# Altium PCB Pedal_Filters.PcbDoc (part 4 of 4)
Units mm, origin at the board's own origin, x right, y up, seen from the top; angles counter-clockwise.
Board outline 120.65 x 86.55 mm, 4 copper layers (Top Layer, Layer 1, Layer 2, Bottom Layer); 245 components, 181 nets, 879 pads, 470 vias.
Unrouted connection lines stored in the file: 24.
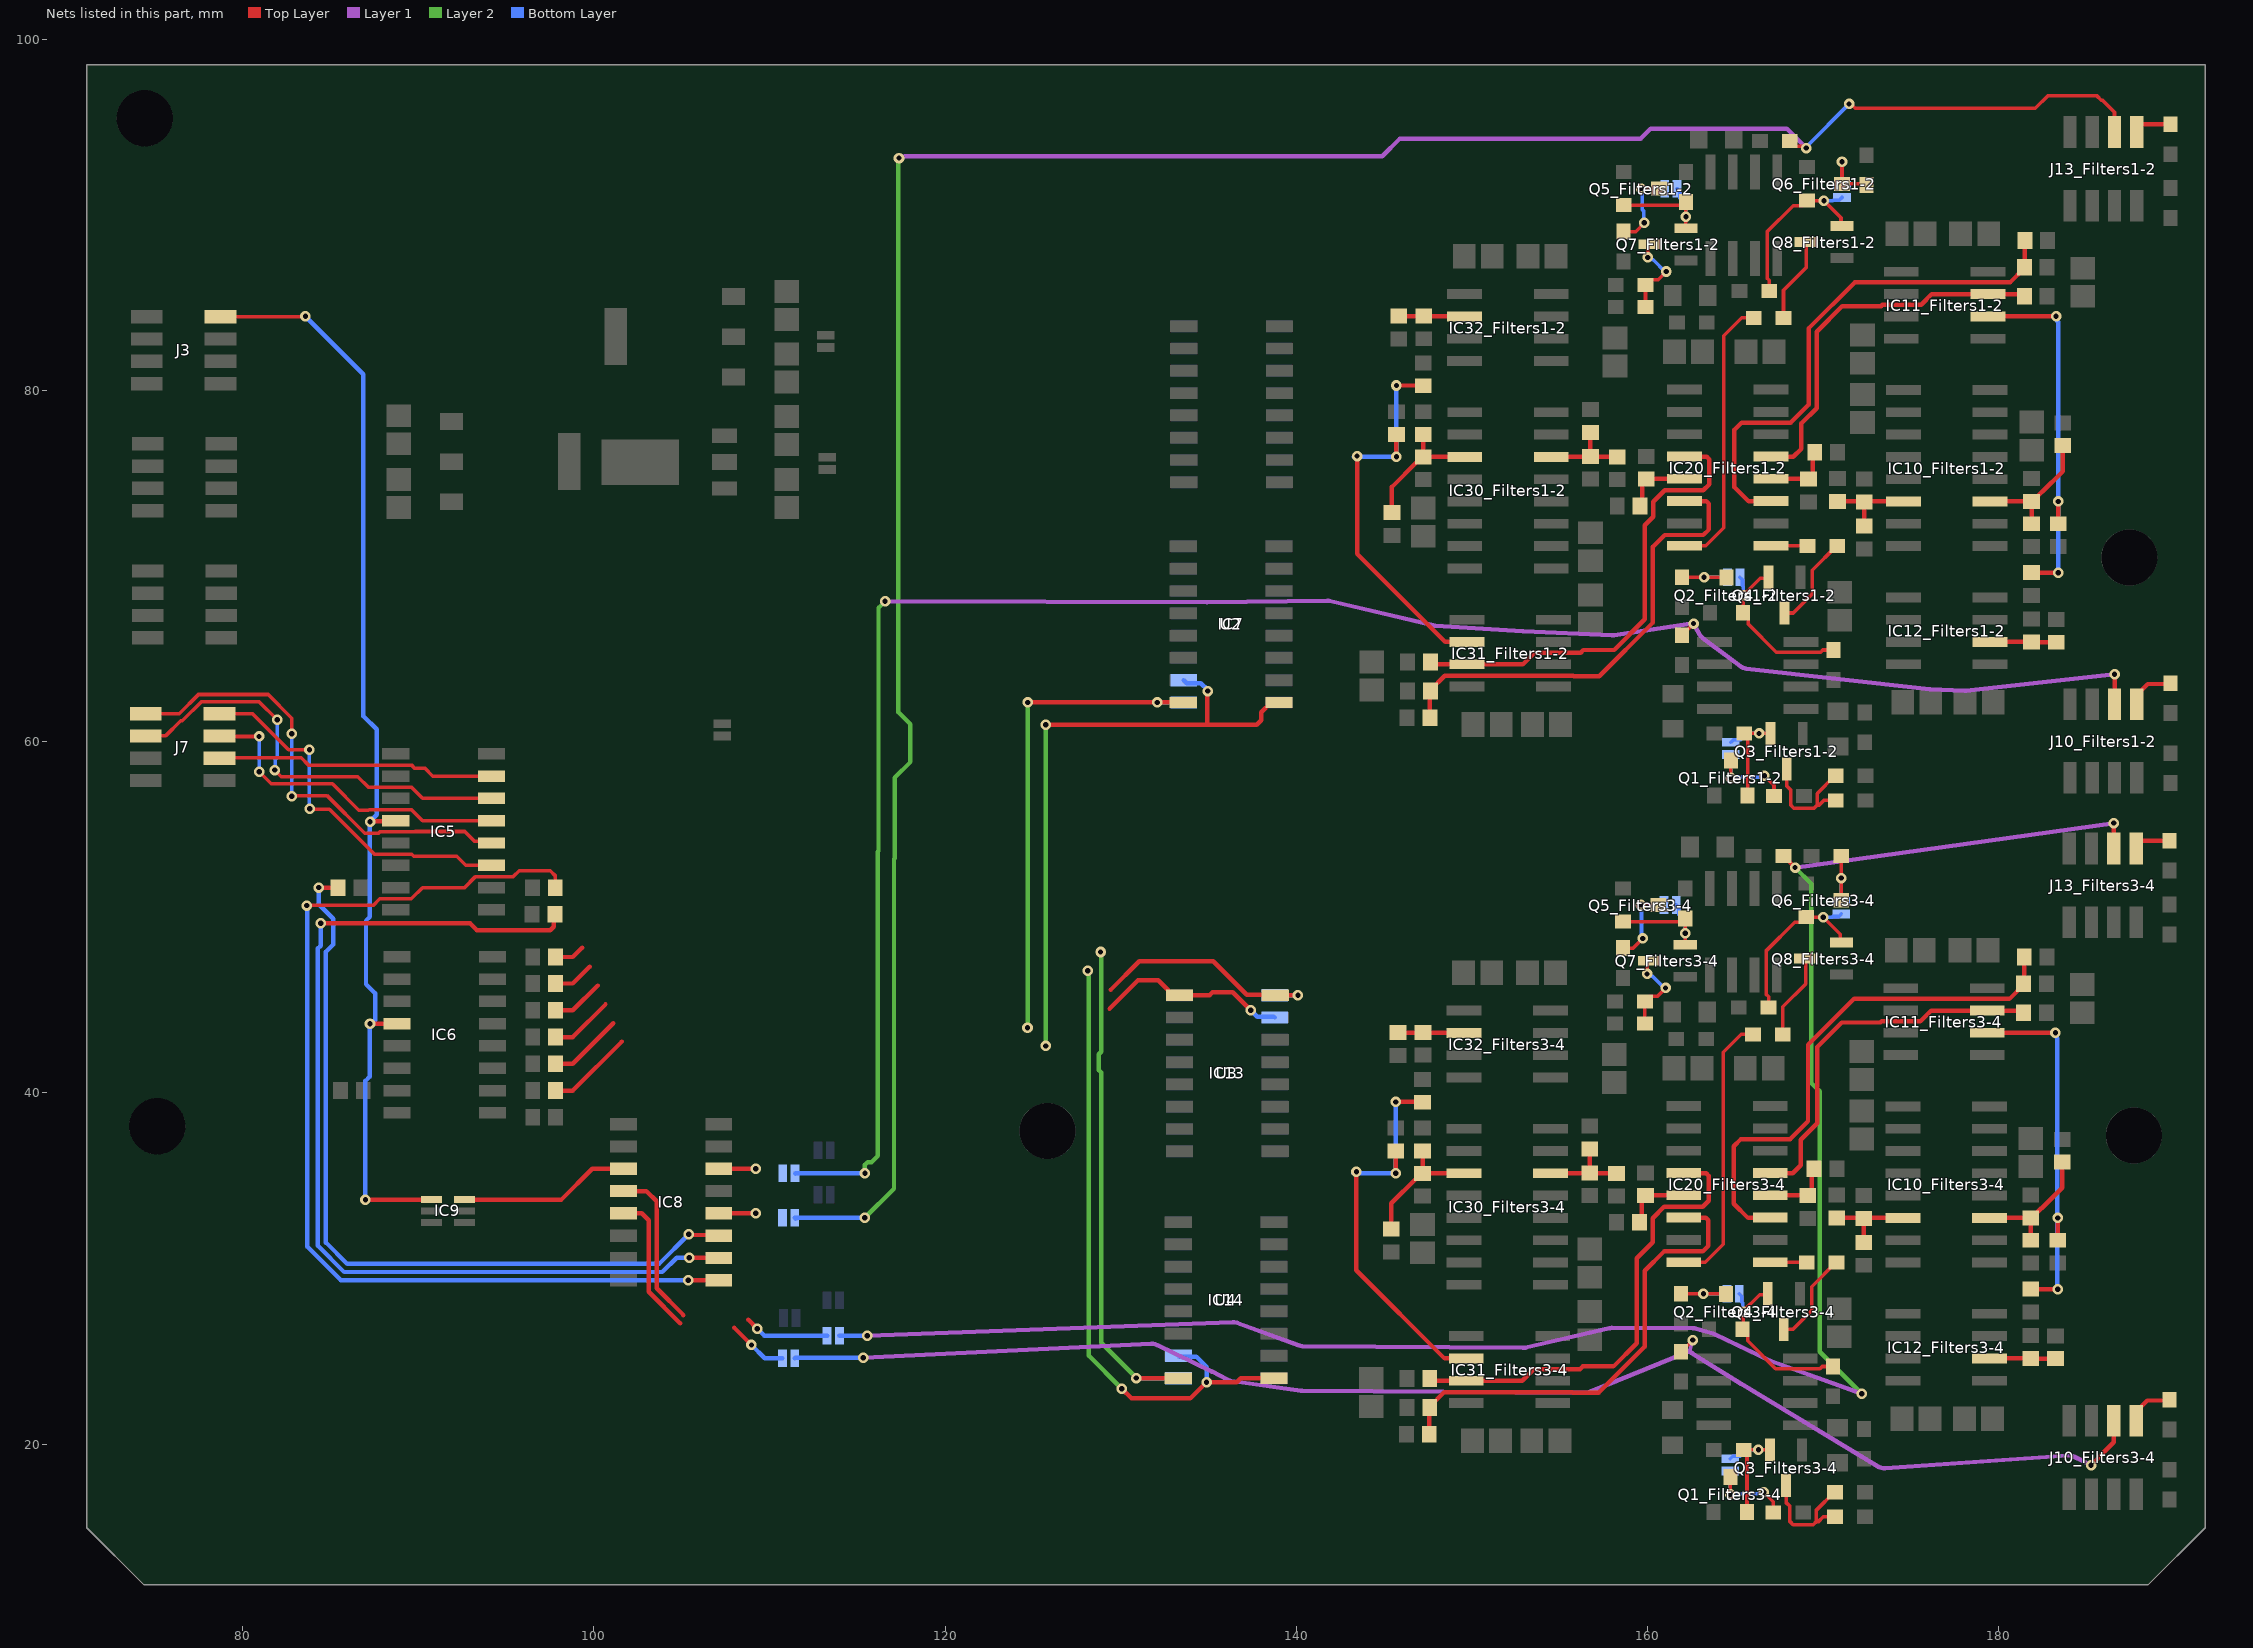
[diagram p6: the nets of this part, all layers, seen from the top]

## Via types
v1: diameter 0.6, hole 0.3, Top Layer to Bottom Layer, tented both sides, 470 vias

## Nets (pads, with @x,y where several pads share a name; then routed paths per layer and width w, separated by ;. In a path a pad name is that pad's centre, name@x,y a point inside that pad or via, vN(x,y) a via of type N, cw(c..) or ccw(c..) an arc to the next point about the centre after c; other vN are vias at no path point) (continued)
NetIC7_1: IC7.1 R36.1 U2.10 | length 40.9
  Top Layer w0.254: R36.1@97.82,40.132 98.806,40.132 101.6,42.926 ; v1(125.73,60.96) 134.943,60.96 ; v1@134.943,62.867 134.943,60.96 ; IC7.1@139.018,62.232 138.568,62.232 138.011,61.675 138.011,61.225 137.746,60.96 134.943,60.96
  Layer 2 w0.254: v1(125.73,42.672) v1(125.73,60.96)
  Bottom Layer w0.254: U2.10@133.594,63.502 133.761,63.335 134.571,63.335 134.957,62.949 v1(134.957,62.88)
NetIC7_16: IC7.16 R37.1 U2.9 | length 33.1
  Top Layer w0.254: R37.1@97.82,41.656 98.806,41.656 101.11,43.96 ; v1(124.716,62.232) IC7.16@133.568,62.232
  Layer 2 w0.254: v1(124.696,43.706) 124.716,43.726 v1(124.716,62.232)
  Bottom Layer w0.254: v1(132.082,62.232) U2.9@133.594,62.232
NetIC8_3: IC8.3 IC9.6 | length 9.8
  Top Layer w0.254: IC9.6@92.644,33.924 98.156,33.924 99.912,35.68 IC8.3@101.691,35.68 IC8.3@101.676,35.695
NetIC8_9: IC8.9 R35.2 | length 59.4
  Top Layer w0.203: v1(83.652,50.668) 83.656,50.673 87.438,50.673 87.814,51.049 89.606,51.049 90.246,51.689 92.634,51.689 93.264,52.319 95.416,52.319 95.75,52.653 97.512,52.653 97.815,52.35 97.815,51.699 R35.2@97.805,51.689
  Top Layer w0.254: v1(105.374,29.33) IC8.9@107.115,29.33
  Bottom Layer w0.254: v1(83.652,50.668) 83.693,50.627 83.693,31.235 85.586,29.342 v1@105.362,29.342
NetIC8_10: IC8.10 R34.2 | length 56.4
  Top Layer w0.254: v1(84.455,49.657) 92.951,49.657 93.344,49.264 97.52,49.264 97.714,49.458 97.714,50.089 R34.2@97.772,50.147 ; v1(105.437,30.615) 107.099,30.615 IC8.10@107.115,30.6
  Bottom Layer w0.254: v1@84.448,49.65 84.448,48.385 84.287,48.223 84.287,31.288 85.775,29.799 103.905,29.799 104.721,30.615 v1(105.437,30.615)
NetIC8_11: IC8.11 R33.2 | length 45.4
  Top Layer w0.254: v1(84.328,51.689) R33.2@85.441,51.689 ; v1(105.402,31.943) 105.439,31.906 107.078,31.906 IC8.11@107.115,31.87
  Bottom Layer w0.254: v1(84.328,51.689) 84.328,50.747 85.159,49.916 85.159,48.449 84.744,48.034 84.744,31.477 85.965,30.256 103.715,30.256 v1(105.402,31.943)
NetIC10_Filters1-2_3: IC10_Filters1-2.3 R3_Filters1-2.2 R7_Filters1-2.2 R9_Filters1-2.1 | length 7.6
  Top Layer w0.254: IC10_Filters1-2.3@179.514,73.679 R3_Filters1-2.2@181.877,73.679 ; R7_Filters1-2.2@181.877,72.409 R3_Filters1-2.2@181.877,73.679 ; R9_Filters1-2.1@183.655,76.854 183.655,75.39 182.488,74.224 182.471,74.224 181.927,73.679 R3_Filters1-2.2@181.877,73.679
NetIC10_Filters1-2_14: IC10_Filters1-2.14 R1_Filters1-2.2 R4_Filters1-2.2 R8_Filters1-2.1 | length 5.2
  Top Layer w0.254: R4_Filters1-2.2@170.828,73.679 172.322,73.679 R1_Filters1-2.2@172.352,73.649 ; R8_Filters1-2.1@172.352,72.282 R1_Filters1-2.2@172.352,73.649 ; IC10_Filters1-2.14@174.587,73.679 172.382,73.679 R1_Filters1-2.2@172.352,73.649
NetIC10_Filters3-4_3: IC10_Filters3-4.3 R3_Filters3-4.2 R7_Filters3-4.2 R9_Filters3-4.1 | length 7.6
  Top Layer w0.254: IC10_Filters3-4.3@179.476,32.878 R3_Filters3-4.2@181.839,32.878 ; R7_Filters3-4.2@181.839,31.608 R3_Filters3-4.2@181.839,32.878 ; R9_Filters3-4.1@183.617,36.053 183.617,34.589 182.45,33.423 182.433,33.423 181.889,32.878 R3_Filters3-4.2@181.839,32.878
NetIC10_Filters3-4_14: IC10_Filters3-4.14 R1_Filters3-4.2 R4_Filters3-4.2 R8_Filters3-4.1 | length 5.2
  Top Layer w0.254: R4_Filters3-4.2@170.79,32.878 172.284,32.878 R1_Filters3-4.2@172.314,32.848 ; R8_Filters3-4.1@172.314,31.481 R1_Filters3-4.2@172.314,32.848 ; IC10_Filters3-4.14@174.549,32.878 172.344,32.878 R1_Filters3-4.2@172.314,32.848
NetIC11_Filters1-2_2: IC11_Filters1-2.2 R10_Filters1-2.1 R11_Filters1-2.1 | length 21.4
  Top Layer w0.254: IC11_Filters1-2.2@179.387,84.22 v1(183.274,84.22) ; R11_Filters1-2.1@181.877,69.63 181.892,69.615 v1(183.401,69.615) ; R10_Filters1-2.1@183.401,72.409 v1(183.401,73.679)
  Bottom Layer w0.254: v1(183.274,84.22) 183.34,84.154 183.34,83.943 183.384,83.898 v1@183.384,69.593
NetIC11_Filters1-2_3: IC11_Filters1-2.3 IC20_Filters1-2.5 R6_Filters1-2.2 | length 21.7
  Top Layer w0.254: IC20_Filters1-2.5@167.018,76.219 168.309,76.219 168.772,76.683 168.772,78.13 169.635,78.993 169.635,83.342 171.102,84.809 173.312,84.809 173.383,84.881 175.587,84.881 176.197,85.49 IC11_Filters1-2.3@179.387,85.49 181.339,85.49 R6_Filters1-2.2@181.466,85.363
NetIC11_Filters3-4_2: IC11_Filters3-4.2 R10_Filters3-4.1 R11_Filters3-4.1 | length 21.4
  Top Layer w0.254: IC11_Filters3-4.2@179.349,43.419 v1(183.236,43.419) ; R11_Filters3-4.1@181.839,28.829 181.854,28.814 v1(183.363,28.814) ; R10_Filters3-4.1@183.363,31.608 v1(183.363,32.878)
  Bottom Layer w0.254: v1(183.236,43.419) 183.302,43.353 183.302,43.142 183.346,43.097 v1@183.346,28.731
NetIC11_Filters3-4_3: IC11_Filters3-4.3 IC20_Filters3-4.5 R6_Filters3-4.2 | length 21.7
  Top Layer w0.254: IC20_Filters3-4.5@166.98,35.418 168.271,35.418 168.734,35.882 168.734,37.329 169.667,38.262 169.667,42.611 171.064,44.008 173.274,44.008 173.345,44.079 175.549,44.079 176.159,44.689 IC11_Filters3-4.3@179.349,44.689 181.301,44.689 R6_Filters3-4.2@181.428,44.562
NetIC12_Filters1-2_6: IC12_Filters1-2.6 R2_Filters1-2.2 R5_Filters1-2.1 | length 3.8
  Top Layer w0.254: IC12_Filters1-2.6@179.518,65.682 179.522,65.678 181.862,65.678 181.877,65.663 R2_Filters1-2.2@183.274,65.663
NetIC12_Filters3-4_6: IC12_Filters3-4.6 R2_Filters3-4.2 R5_Filters3-4.1 | length 3.8
  Top Layer w0.254: IC12_Filters3-4.6@179.48,24.881 179.484,24.877 181.824,24.877 181.839,24.862 R2_Filters3-4.2@183.236,24.862
NetIC13_1: IC13.1 R38.1 U3.10 | length 14.8
  Top Layer w0.254: R38.1@97.82,43.18 98.806,43.18 100.664,45.038 ; 129.366,44.784 130.99,46.408 132.143,46.408 132.704,45.847 132.704,45.759 132.902,45.561 135.066,45.561 135.232,45.727 136.391,45.727 v1(137.414,44.704)
  Bottom Layer w0.254: v1(137.414,44.704) 137.781,44.337 138.73,44.337 U3.10@138.776,44.291
NetIC13_16: IC13.16 R39.1 U3.9 | length 16.4
  Top Layer w0.254: R39.1@97.82,44.704 98.806,44.704 100.217,46.115 ; 129.427,45.861 131.064,47.498 135.267,47.498 137.183,45.581 138.782,45.581 IC13.16@138.802,45.561 v1(140.095,45.561)
  Bottom Layer w0.254: U3.9@138.776,45.561 v1(140.095,45.561)
NetIC14_1: IC14.1 R40.1 U4.10 | length 39
  Top Layer w0.254: R40.1@97.82,46.228 98.806,46.228 99.771,47.193 ; v1@128.115,46.939 v1(128.125,46.949) ; v1(130.07,23.155) 130.619,22.606 133.976,22.606 v1(134.892,23.522) 136.617,23.522 136.846,23.751 IC14.1@138.727,23.751
  Layer 2 w0.254: v1(128.125,46.949) 128.186,46.889 128.186,25.04 v1(130.07,23.155)
  Bottom Layer w0.254: U4.10@133.303,25.021 133.343,24.981 134.298,24.981 134.897,24.383 134.897,23.527 v1(134.892,23.522)
NetIC14_16: IC14.16 R41.1 U4.9 | length 31.8
  Top Layer w0.254: R41.1@97.82,47.737 98.806,47.737 99.329,48.26 ; v1@128.844,48.006 v1(128.86,48.022) ; v1(130.892,23.761) 130.897,23.756 133.272,23.756 IC14.16@133.277,23.751
  Layer 2 w0.254: v1(128.86,48.022) 128.895,47.987 128.895,42.342 128.755,42.201 128.755,41.301 128.895,41.16 128.895,25.775 130.892,23.779 v1(130.892,23.761)
  Bottom Layer w0.254: v1(130.892,23.761) 130.901,23.751 U4.9@133.303,23.751
NetIC20_Filters1-2_3: IC20_Filters1-2.3 R12_Filters1-2.2 R13_Filters1-2.1 | length 30.1
  Top Layer w0.254: IC20_Filters1-2.3@167.018,73.679 165.769,73.679 164.957,74.49 164.957,77.765 165.363,78.171 168.166,78.171 169.178,79.182 169.178,83.531 171.818,86.171 173.312,86.171 173.332,86.151 180.652,86.151 R13_Filters1-2.1@181.456,86.954 ; R13_Filters1-2.1@181.466,87.014 181.496,87.044 R12_Filters1-2.2@181.496,88.538
NetIC20_Filters1-2_4: IC20_Filters1-2.4 R14_Filters1-2.2 R15_Filters1-2.1 | length 3.8
  Top Layer w0.254: IC20_Filters1-2.4@167.018,74.949 IC20_Filters1-2.4@167.039,74.97 169.156,74.97 R14_Filters1-2.2@169.177,74.949 169.406,75.178 169.406,76.351 R15_Filters1-2.1@169.528,76.473
NetIC20_Filters1-2_12: IC20_Filters1-2.12 IC31_Filters1-2.3 R27_Filters1-2.2 | length 26.7
  Top Layer w0.254: R27_Filters1-2.2@147.642,64.535 147.769,64.408 IC31_Filters1-2.3@149.72,64.408 152.911,64.408 153.571,65.069 156.199,65.069 156.352,65.221 158.103,65.221 159.855,66.973 159.855,72.333 160.335,72.813 160.335,73.661 160.984,74.31 163.188,74.31 163.53,74.652 163.53,76.07 163.381,76.219 IC20_Filters1-2.12@162.09,76.219
NetIC20_Filters1-2_13: IC20_Filters1-2.13 R16_Filters1-2.1 R17_Filters1-2.2 | length 3.8
  Top Layer w0.254: R16_Filters1-2.1@159.58,73.425 159.702,73.547 159.702,74.72 159.952,74.97 162.069,74.97 IC20_Filters1-2.13@162.09,74.949
NetIC20_Filters1-2_14: IC20_Filters1-2.14 R18_Filters1-2.1 R19_Filters1-2.2 | length 26.6
  Top Layer w0.254: R19_Filters1-2.2@147.612,61.36 147.612,62.854 R18_Filters1-2.1@147.642,62.884 ; R18_Filters1-2.1@147.652,62.944 148.456,63.748 155.775,63.748 155.796,63.727 157.255,63.727 160.312,66.784 160.312,71.098 160.984,71.77 163.188,71.77 163.503,72.085 163.503,73.551 163.354,73.7 IC20_Filters1-2.14@162.111,73.7
NetIC20_Filters3-4_3: IC20_Filters3-4.3 R12_Filters3-4.2 R13_Filters3-4.1 | length 30.1
  Top Layer w0.254: IC20_Filters3-4.3@166.98,32.878 165.731,32.878 164.919,33.689 164.919,36.964 165.325,37.369 168.128,37.369 169.144,38.386 169.144,42.735 171.78,45.37 173.274,45.37 173.294,45.349 180.614,45.349 R13_Filters3-4.1@181.418,46.153 ; R13_Filters3-4.1@181.428,46.213 181.458,46.243 R12_Filters3-4.2@181.458,47.737
NetIC20_Filters3-4_4: IC20_Filters3-4.4 R14_Filters3-4.2 R15_Filters3-4.1 | length 3.8
  Top Layer w0.254: IC20_Filters3-4.4@166.98,34.148 IC20_Filters3-4.4@167.001,34.169 169.118,34.169 R14_Filters3-4.2@169.139,34.148 169.368,34.377 169.368,35.55 R15_Filters3-4.1@169.49,35.672
NetIC20_Filters3-4_12: IC20_Filters3-4.12 IC31_Filters3-4.3 R27_Filters3-4.2 | length 26.7
  Top Layer w0.254: R27_Filters3-4.2@147.604,23.734 147.731,23.607 IC31_Filters3-4.3@149.682,23.607 152.873,23.607 153.533,24.267 156.161,24.267 156.314,24.42 158.065,24.42 159.385,25.74 159.385,30.585 160.297,31.498 160.297,32.86 160.946,33.509 163.15,33.509 163.492,33.851 163.492,35.269 163.343,35.418 IC20_Filters3-4.12@162.052,35.418
NetIC20_Filters3-4_13: IC20_Filters3-4.13 R16_Filters3-4.1 R17_Filters3-4.2 | length 3.8
  Top Layer w0.254: R16_Filters3-4.1@159.542,32.624 159.664,32.746 159.664,33.919 159.914,34.169 162.031,34.169 IC20_Filters3-4.13@162.052,34.148
NetIC20_Filters3-4_14: IC20_Filters3-4.14 R18_Filters3-4.1 R19_Filters3-4.2 | length 26.6
  Top Layer w0.254: R19_Filters3-4.2@147.574,20.559 147.574,22.053 R18_Filters3-4.1@147.604,22.083 ; R18_Filters3-4.1@147.614,22.143 148.418,22.947 155.737,22.947 155.758,22.926 157.217,22.926 159.842,25.551 159.842,29.865 160.946,30.969 163.15,30.969 163.465,31.284 163.465,32.75 163.316,32.899 IC20_Filters3-4.14@162.073,32.899
NetIC30_Filters1-2_3: IC30_Filters1-2.3 R24_Filters1-2.1 R26_Filters1-2.2 R30_Filters1-2.2 | length 7.6
  Top Layer w0.254: R24_Filters1-2.1@145.453,73.044 145.453,74.508 146.866,75.921 146.933,75.921 R30_Filters1-2.2@147.231,76.219 ; R26_Filters1-2.2@147.231,77.489 R30_Filters1-2.2@147.231,76.219 ; IC30_Filters1-2.3@149.593,76.219 R30_Filters1-2.2@147.231,76.219
NetIC30_Filters1-2_14: IC30_Filters1-2.14 R25_Filters1-2.1 R29_Filters1-2.2 R32_Filters1-2.2 | length 5.2
  Top Layer w0.254: IC30_Filters1-2.14@154.521,76.219 156.726,76.219 R32_Filters1-2.2@156.756,76.249 ; R25_Filters1-2.1@156.756,77.616 R32_Filters1-2.2@156.756,76.249 ; R29_Filters1-2.2@158.28,76.219 156.786,76.219 R32_Filters1-2.2@156.756,76.249
NetIC30_Filters3-4_3: IC30_Filters3-4.3 R24_Filters3-4.1 R26_Filters3-4.2 R30_Filters3-4.2 | length 7.6
  Top Layer w0.254: R24_Filters3-4.1@145.415,32.243 145.415,33.707 146.828,35.12 146.895,35.12 R30_Filters3-4.2@147.193,35.418 ; R26_Filters3-4.2@147.193,36.688 R30_Filters3-4.2@147.193,35.418 ; IC30_Filters3-4.3@149.555,35.418 R30_Filters3-4.2@147.193,35.418
NetIC30_Filters3-4_14: IC30_Filters3-4.14 R25_Filters3-4.1 R29_Filters3-4.2 R32_Filters3-4.2 | length 5.2
  Top Layer w0.254: IC30_Filters3-4.14@154.483,35.418 156.688,35.418 R32_Filters3-4.2@156.718,35.448 ; R25_Filters3-4.1@156.718,36.815 R32_Filters3-4.2@156.718,35.448 ; R29_Filters3-4.2@158.242,35.418 156.748,35.418 R32_Filters3-4.2@156.718,35.448
NetIC31_Filters1-2_2: IC31_Filters1-2.2 R20_Filters1-2.1 R23_Filters1-2.1 | length 23.2
  Top Layer w0.254: v1(143.464,76.264) 143.464,70.701 148.487,65.678 IC31_Filters1-2.2@149.72,65.678 ; v1(145.707,76.219) R23_Filters1-2.1@145.707,77.489 ; v1(145.707,80.283) 147.216,80.283 R20_Filters1-2.1@147.231,80.268
  Bottom Layer w0.254: v1@143.276,76.238 143.438,76.238 v1(143.464,76.264) ; v1@143.513,76.238 143.532,76.219 v1(145.707,76.219) v1@145.707,80.299
NetIC31_Filters3-4_2: IC31_Filters3-4.2 R20_Filters3-4.1 R23_Filters3-4.1 | length 23.2
  Top Layer w0.254: v1(143.426,35.503) 143.426,29.9 148.449,24.877 IC31_Filters3-4.2@149.682,24.877 ; v1(145.669,35.418) R23_Filters3-4.1@145.669,36.688 ; v1(145.669,39.482) 147.178,39.482 R20_Filters3-4.1@147.193,39.467
  Bottom Layer w0.254: v1@143.238,35.437 143.475,35.437 143.494,35.418 145.666,35.418 v1@145.666,39.459
NetIC32_Filters1-2_6: IC32_Filters1-2.6 R28_Filters1-2.1 R31_Filters1-2.2 | length 3.8
  Top Layer w0.254: R31_Filters1-2.2@145.834,84.235 147.257,84.235 147.276,84.217 IC32_Filters1-2.6@149.59,84.217
NetIC32_Filters3-4_6: IC32_Filters3-4.6 R28_Filters3-4.1 R31_Filters3-4.2 | length 3.8
  Top Layer w0.254: R31_Filters3-4.2@145.796,43.434 147.219,43.434 147.238,43.415 IC32_Filters3-4.6@149.552,43.415
NetJ8_Filters1-2_1: J8_Filters1-2.1 Q1_Filters1-2.3 R42_Filters1-2.2 | length 5.7
  Top Layer w0.203: v1(164.757,57.931) Q1_Filters1-2.3@164.757,58.931 ; v1(166.662,58.058) 167.209,57.511 R42_Filters1-2.2@167.209,56.915
  Bottom Layer w0.203: J8_Filters1-2.1@164.757,59.263 164.757,58.007 v1(164.757,57.931) 164.807,57.981 166.478,57.981 166.555,58.058 v1(166.662,58.058)
NetJ8_Filters1-2_2: J8_Filters1-2.2 Q1_Filters1-2.2 Q3_Filters1-2.2 R43_Filters1-2.1 | length 6.9
  Top Layer w0.203: Q1_Filters1-2.2@165.707,56.931 165.707,60.283 R43_Filters1-2.1@165.519,60.471 Q3_Filters1-2.2@167.018,60.471
  Bottom Layer w0.203: J8_Filters1-2.2@164.757,59.963 164.905,60.112 165.312,60.112 165.671,60.471 v1(166.359,60.471)
NetJ8_Filters3-4_1: J8_Filters3-4.1 Q1_Filters3-4.3 R42_Filters3-4.2 | length 5.7
  Top Layer w0.203: v1(164.719,17.13) Q1_Filters3-4.3@164.719,18.13 ; v1(166.624,17.257) 167.171,16.71 R42_Filters3-4.2@167.171,16.114
  Bottom Layer w0.203: J8_Filters3-4.1@164.719,18.462 164.719,17.206 v1(164.719,17.13) 164.769,17.18 166.44,17.18 166.517,17.257 v1(166.624,17.257)
NetJ8_Filters3-4_2: J8_Filters3-4.2 Q1_Filters3-4.2 Q3_Filters3-4.2 R43_Filters3-4.1 | length 6.9
  Top Layer w0.203: Q1_Filters3-4.2@165.669,16.13 165.669,19.482 R43_Filters3-4.1@165.481,19.67 Q3_Filters3-4.2@166.98,19.67
  Bottom Layer w0.203: J8_Filters3-4.2@164.719,19.162 164.867,19.31 165.274,19.31 165.633,19.67 v1(166.321,19.67)
NetJ9_Filters1-2_1: J9_Filters1-2.1 Q2_Filters1-2.3 R44_Filters1-2.2 | length 3.9
  Top Layer w0.203: R44_Filters1-2.2@161.963,69.361 164.487,69.361 Q2_Filters1-2.3@164.503,69.345
  Bottom Layer w0.203: v1(163.225,69.361) J9_Filters1-2.1@164.565,69.361
NetJ9_Filters1-2_2: J9_Filters1-2.2 Q2_Filters1-2.2 Q4_Filters1-2.2 R45_Filters1-2.1 | length 10.3
  Top Layer w0.203: Q4_Filters1-2.2@166.891,69.361 166.832,69.303 166.425,69.303 v1(165.456,68.333) 165.456,67.348 Q2_Filters1-2.2@165.453,67.345 165.751,67.047 165.751,66.678 167.335,65.094 169.862,65.094 169.987,65.219 R45_Filters1-2.1@170.599,65.219
  Bottom Layer w0.203: J9_Filters1-2.2@165.265,69.361 165.413,69.213 165.413,68.886 165.456,68.844 v1(165.456,68.333)
NetJ9_Filters3-4_1: J9_Filters3-4.1 Q2_Filters3-4.3 R44_Filters3-4.2 | length 3.9
  Top Layer w0.203: R44_Filters3-4.2@161.925,28.56 164.449,28.56 Q2_Filters3-4.3@164.465,28.544
  Bottom Layer w0.203: v1(163.187,28.56) J9_Filters3-4.1@164.527,28.56
NetJ9_Filters3-4_2: J9_Filters3-4.2 Q2_Filters3-4.2 Q4_Filters3-4.2 R45_Filters3-4.1 | length 10.3
  Top Layer w0.203: v1@165.418,27.532 166.387,28.501 166.794,28.501 Q4_Filters3-4.2@166.853,28.56 ; v1(165.463,27.532) 165.463,26.592 Q2_Filters3-4.2@165.415,26.544 165.713,26.246 165.713,25.876 167.297,24.293 169.824,24.293 169.949,24.418 R45_Filters3-4.1@170.561,24.418
  Bottom Layer w0.203: J9_Filters3-4.2@165.227,28.56 165.375,28.412 165.375,28.085 165.418,28.043 165.418,27.578 v1(165.463,27.532)
NetJ11_Filters1-2_1: J11_Filters1-2.1 Q5_Filters1-2.3 R52_Filters1-2.2 | length 5.8
  Top Layer w0.203: R52_Filters1-2.2@158.636,89.048 159.326,89.048 v1(159.826,89.547) ; v1(159.652,91.5) Q5_Filters1-2.3@160.652,91.5
  Bottom Layer w0.203: v1(159.826,89.547) 159.779,89.594 159.779,90.224 159.702,90.301 159.702,91.449 v1(159.652,91.5) 159.728,91.5 J11_Filters1-2.1@160.984,91.5
NetJ11_Filters1-2_2: J11_Filters1-2.2 Q5_Filters1-2.2 Q7_Filters1-2.2 R53_Filters1-2.1 | length 6.9
  Top Layer w0.203: Q5_Filters1-2.2@158.652,90.55 162.004,90.55 R53_Filters1-2.1@162.192,90.738 Q7_Filters1-2.2@162.192,89.239
  Bottom Layer w0.203: J11_Filters1-2.2@161.684,91.5 161.832,91.351 161.832,90.945 162.192,90.585 v1(162.192,89.898)
NetJ11_Filters3-4_1: J11_Filters3-4.1 Q5_Filters3-4.3 R52_Filters3-4.2 | length 5.7
  Top Layer w0.203: R52_Filters3-4.2@158.598,48.246 159.194,48.246 v1(159.741,48.793) ; v1(159.614,50.698) Q5_Filters3-4.3@160.614,50.698
  Bottom Layer w0.203: v1(159.741,48.793) 159.741,48.901 159.664,48.978 159.664,50.648 v1(159.614,50.698) 159.69,50.698 J11_Filters3-4.1@160.946,50.698
NetJ11_Filters3-4_2: J11_Filters3-4.2 Q5_Filters3-4.2 Q7_Filters3-4.2 R53_Filters3-4.1 | length 6.9
  Top Layer w0.203: Q5_Filters3-4.2@158.614,49.748 161.966,49.748 R53_Filters3-4.1@162.154,49.936 Q7_Filters3-4.2@162.154,48.438
  Bottom Layer w0.203: J11_Filters3-4.2@161.646,50.698 161.794,50.55 161.794,50.144 162.154,49.784 v1(162.154,49.097)
NetJ12_Filters1-2_1: J12_Filters1-2.1 Q6_Filters1-2.3 R54_Filters1-2.2 | length 4
  Top Layer w0.203: v1(171.082,93.032) Q6_Filters1-2.3@171.082,91.77 172.39,91.77 R54_Filters1-2.2@172.466,91.694
  Bottom Layer w0.203: J12_Filters1-2.1@171.082,91.692 v1(171.082,93.032)
NetJ12_Filters1-2_2: J12_Filters1-2.2 Q6_Filters1-2.2 Q8_Filters1-2.2 R55_Filters1-2.1 | length 10.4
  Top Layer w0.203: R55_Filters1-2.1@166.94,85.658 166.94,86.27 166.814,86.395 166.814,89.04 168.296,90.521 168.783,90.521 169.066,90.804 169.068,90.801 v1(170.053,90.801) 171.023,89.831 171.023,89.425 Q8_Filters1-2.2@171.082,89.366
  Bottom Layer w0.203: v1(170.053,90.801) 170.564,90.801 170.606,90.843 170.933,90.843 J12_Filters1-2.2@171.082,90.992
NetJ12_Filters3-4_1: J12_Filters3-4.1 Q6_Filters3-4.3 R54_Filters3-4.2 | length 3.9
  Top Layer w0.203: Q6_Filters3-4.3@171.044,50.968 R54_Filters3-4.2@171.044,53.492
  Bottom Layer w0.203: J12_Filters3-4.1@171.044,50.89 v1(171.044,52.23)
NetJ12_Filters3-4_2: J12_Filters3-4.2 Q6_Filters3-4.2 Q8_Filters3-4.2 R55_Filters3-4.1 | length 10.3
  Top Layer w0.203: R55_Filters3-4.1@166.902,44.856 166.902,45.469 166.776,45.594 166.776,48.112 168.384,49.72 168.745,49.72 169.028,50.002 169.03,50 v1(170.015,50) 170.985,49.03 170.985,48.623 Q8_Filters3-4.2@171.044,48.565
  Bottom Layer w0.203: v1(170.015,50) 170.526,50 170.568,50.042 170.895,50.042 J12_Filters3-4.2@171.044,50.19
NetQ3_Filters1-2_3: Q3_Filters1-2.3 R49_Filters1-2.2 R50_Filters1-2.2 | length 7.1
  Top Layer w0.203: Q3_Filters1-2.3@167.932,58.439 167.932,57.473 168.154,57.251 168.154,56.389 168.333,56.21 169.485,56.21 169.664,56.389 ; R50_Filters1-2.2@170.726,56.661 170.052,56.661 169.78,56.389 169.664,56.389 ; R49_Filters1-2.2@170.726,58.058 170.676,58.058 169.664,57.046 169.664,56.588 169.664,56.389
NetQ3_Filters3-4_3: Q3_Filters3-4.3 R49_Filters3-4.2 R50_Filters3-4.2 | length 7.1
  Top Layer w0.203: Q3_Filters3-4.3@167.894,17.638 167.894,16.672 168.116,16.45 168.116,15.588 168.295,15.409 169.447,15.409 169.626,15.588 ; R50_Filters3-4.2@170.688,15.86 170.014,15.86 169.742,15.588 169.626,15.588 ; R49_Filters3-4.2@170.688,17.257 170.638,17.257 169.626,16.245 169.626,15.588
NetQ4_Filters1-2_3: Q4_Filters1-2.3 R51_Filters1-2.2 | length 5.4
  Top Layer w0.203: Q4_Filters1-2.3@167.805,67.329 168.308,67.329 169.387,68.408 169.387,69.762 170.764,71.139 R51_Filters1-2.2@170.814,71.139
NetQ4_Filters3-4_3: Q4_Filters3-4.3 R51_Filters3-4.2 | length 5.4
  Top Layer w0.203: Q4_Filters3-4.3@167.767,26.528 168.27,26.528 169.349,27.607 169.349,28.961 170.726,30.338 R51_Filters3-4.2@170.776,30.338
NetQ7_Filters1-2_3: Q7_Filters1-2.3 R60_Filters1-2.2 R61_Filters1-2.2 | length 5
  Top Layer w0.203: R61_Filters1-2.2@159.892,84.743 R60_Filters1-2.2@159.892,86.013 160.19,86.312 160.61,86.312 v1(161.074,86.775) ; v1(160.02,87.575) 160.02,88.185 Q7_Filters1-2.3@160.16,88.325
  Bottom Layer w0.203: v1(160.02,87.575) 160.127,87.575 160.265,87.437 160.331,87.437 160.993,86.775 v1(161.074,86.775)
NetQ7_Filters3-4_3: Q7_Filters3-4.3 R60_Filters3-4.2 R61_Filters3-4.2 | length 5
  Top Layer w0.203: R61_Filters3-4.2@159.854,43.942 R60_Filters3-4.2@159.854,45.212 160.152,45.51 160.572,45.51 v1(161.036,45.974) ; v1(159.982,46.774) 159.982,47.384 Q7_Filters3-4.3@160.122,47.523
  Bottom Layer w0.203: v1(159.982,46.774) 160.089,46.774 160.227,46.636 160.293,46.636 160.955,45.974 v1(161.036,45.974)
NetQ8_Filters1-2_3: Q8_Filters1-2.3 R62_Filters1-2.2 | length 4.9
  Top Layer w0.203: R62_Filters1-2.2@167.75,84.135 167.75,85.704 169.05,87.003 Q8_Filters1-2.3@169.05,88.452
NetQ8_Filters3-4_3: Q8_Filters3-4.3 R62_Filters3-4.2 | length 4.9
  Top Layer w0.203: R62_Filters3-4.2@167.712,43.334 167.712,44.902 169.012,46.202 Q8_Filters3-4.3@169.012,47.65
NSS: IC5.12 IC6.12 IC9.1 J3.1 | length 64.3
  Top Layer w0.203: J3.1@78.74,84.201 83.547,84.201 v1(83.574,84.228)
  Top Layer w0.254: v1(86.995,33.909) 87.01,33.924 IC9.1@90.744,33.924 ; v1(87.254,43.942) IC6.12@88.784,43.942 ; v1(87.258,55.442) 87.287,55.47 88.686,55.47 IC5.12@88.715,55.499
  Bottom Layer w0.254: v1(83.574,84.228) 86.876,80.926 86.876,61.46 87.63,60.706 87.63,55.843 87.255,55.468 v1@87.249,55.462 ; v1(86.995,33.909) 86.995,40.681 87.244,40.931 87.244,43.932 v1(87.254,43.942) ; v1@87.254,43.992 87.397,43.992 87.546,44.141 87.549,44.141 87.549,45.662 87.025,46.186 87.025,49.814 87.249,50.038 87.249,55.432 v1(87.258,55.442)
Q1: IC8.14 J15.1 | length 2.1
  Top Layer w0.254: IC8.14@107.115,35.68 107.119,35.684 v1(109.22,35.684)
Q2: IC8.12 J17.1 | length 2.1
  Top Layer w0.254: IC8.12@107.115,33.14 v1(109.22,33.14)
Q3: IC8.5 J19.1 | length 11.7
  Top Layer w0.254: IC8.5@101.691,33.14 102.733,33.14 103.124,32.749 103.124,28.677 104.912,26.888 ; 107.986,26.634 v1(108.977,25.643)
  Bottom Layer w0.254: v1(108.977,25.643) 109.728,24.892 J19.1@110.744,24.892
Q4: IC8.4 J21.1 | length 14.1
  Top Layer w0.254: IC8.4@101.691,34.41 102.993,34.41 103.581,33.822 103.581,28.866 105.102,27.346 ; 108.787,27.092 v1(109.308,26.57)
  Bottom Layer w0.254: v1(109.308,26.57) 109.716,26.162 J21.1@113.284,26.162
Q_1_Filters1-2: IC20_Filters1-2.1 R51_Filters1-2.1 | length 2.1
  Top Layer w0.203: IC20_Filters1-2.1@167.039,71.16 169.093,71.16 R51_Filters1-2.1@169.114,71.139
Q_1_Filters3-4: IC20_Filters3-4.1 R51_Filters3-4.1 | length 2.1
  Top Layer w0.203: IC20_Filters3-4.1@167.001,30.359 169.055,30.359 R51_Filters3-4.1@169.076,30.338
Q_2_Filters1-2: IC20_Filters1-2.16 R62_Filters1-2.1 | length 15.7
  Top Layer w0.203: IC20_Filters1-2.16@162.111,71.16 163.325,71.16 164.351,72.186 164.351,83.109 165.376,84.135 R62_Filters1-2.1@166.05,84.135
Q_2_Filters3-4: IC20_Filters3-4.16 R62_Filters3-4.1 | length 15.7
  Top Layer w0.203: IC20_Filters3-4.16@162.073,30.359 163.287,30.359 164.313,31.384 164.313,42.308 165.338,43.334 R62_Filters3-4.1@166.012,43.334
Q_POT_T1_Filters1-2: J10_Filters1-2.2 R63_Filters1-2.2 | length 2.5
  Top Layer w0.254: J10_Filters1-2.2@187.871,62.369 187.871,62.657 188.497,63.283 189.73,63.283 R63_Filters1-2.2@189.776,63.329
Q_POT_T1_Filters3-4: J10_Filters3-4.2 R63_Filters3-4.2 | length 2.7
  Top Layer w0.254: J10_Filters3-4.2@187.833,21.336 187.833,21.856 188.459,22.482 189.692,22.482 R63_Filters3-4.2@189.738,22.528
Q_POT_T2_Filters1-2: J13_Filters1-2.2 R57_Filters1-2.2 | length 2
  Top Layer w0.254: J13_Filters1-2.2@187.871,94.904 188.124,95.157 R57_Filters1-2.2@189.776,95.157
Q_POT_T2_Filters3-4: J13_Filters3-4.2 R57_Filters3-4.2 | length 2.2
  Top Layer w0.254: J13_Filters3-4.2@187.833,53.916 187.833,54.103 188.086,54.356 R57_Filters3-4.2@189.738,54.356
Q_POT_W1_Filters1-2: J10_Filters1-2.4 J15.2 R48_Filters1-2.1 | length 111.2
  Top Layer w0.203: R48_Filters1-2.1@161.963,66.109 162.261,66.408 162.309,66.408 v1(162.626,66.724) v1(162.626,66.724)
  Top Layer w0.254: J10_Filters1-2.4@186.601,62.137 v1(186.601,63.838)
  Layer 1 w0.254: v1(116.586,67.991) 134.908,67.927 ccw(c134.91,68.608) 134.92,67.927 141.759,68.029 cw(c141.769,67.348) 141.926,68.01 147.805,66.622 ccw(c147.961,67.285) 147.917,66.606 152.913,66.283 ccw(c152.958,66.962) 152.927,66.282 157.974,66.053 ccw(c158.005,66.733) 158.108,66.06 162.437,66.721 cw(c162.475,66.47) 162.475,66.724 v1(162.626,66.724) 162.955,66.12 ccw(c163.553,66.445) 163.146,65.899 165.296,64.294 ccw(c165.703,64.839) 165.628,64.162 176.079,62.996 ccw(c176.154,63.673) 176.119,62.993 178.032,62.894 ccw(c178.067,63.574) 178.143,62.898 v1(186.601,63.838)
  Layer 2 w0.254: v1(115.44,35.43) 115.44,35.901 115.589,36.049 115.814,36.049 116.18,36.415 116.18,53.719 116.212,53.751 116.212,67.617 v1(116.586,67.991)
  Bottom Layer w0.254: J15.2@111.511,35.379 J15.2@111.46,35.43 v1(115.44,35.43)
Q_POT_W1_Filters3-4: J10_Filters3-4.4 J19.2 R48_Filters3-4.1 | length 81.6
  Top Layer w0.203: R48_Filters3-4.1@161.925,25.258 161.925,25.308 162.223,25.606 162.271,25.606 v1(162.588,25.923) v1(162.588,25.923)
  Top Layer w0.254: v1(185.262,18.796) 186.563,20.097 J10_Filters3-4.4@186.563,21.336
  Layer 1 w0.203: 162.425,25.251 162.425,25.36 cw(c162.629,25.36) 162.434,25.419 v1(162.588,25.923)
  Layer 1 w0.254: v1(115.342,24.918) 131.756,25.704 cw(c131.788,25.024) 132.085,25.637 135.188,24.135 cw(c134.892,23.522) 135.21,24.124 136.08,23.664 ccw(c136.398,24.266) 136.305,23.591 140.267,23.047 ccw(c140.36,23.722) 140.355,23.041 156.459,22.926 ccw(c156.464,23.607) 156.721,22.976 162.254,25.232 cw(c162.35,24.997) 162.35,25.251 162.425,25.251 162.489,25.21 cw(c162.35,24.997) 162.498,25.203 162.532,25.179 ccw(c162.678,25.387) 162.541,25.173 162.548,25.168 ccw(c162.686,25.382) 162.552,25.166 165.3,23.445 ccw(c165.662,24.022) 165.31,23.439 173.13,18.721 ccw(c173.482,19.304) 173.529,18.625 183.951,19.348 cw(c183.999,18.669) 184.305,19.277 v1(185.262,18.796)
  Bottom Layer w0.254: J19.2@111.444,24.892 111.47,24.918 v1(115.342,24.918)
Q_POT_W2_Filters1-2: J13_Filters1-2.4 J17.2 R59_Filters1-2.1 | length 140.2
  Top Layer w0.203: R59_Filters1-2.1@168.104,94.207 168.402,93.908 168.829,93.908 168.932,93.805 v1(169.039,93.805) ; v1(171.483,96.319) 171.59,96.319 171.837,96.072 182.09,96.072 182.791,96.774 185.603,96.774 185.852,96.525 185.917,96.525 186.601,95.841 J13_Filters1-2.4@186.601,94.717
  Layer 1 w0.254: v1(117.378,93.238) 117.444,93.304 117.66,93.304 117.7,93.344 144.903,93.344 145.905,94.345 159.623,94.345 160.196,94.918 167.927,94.918 v1(169.039,93.805)
  Layer 2 w0.254: v1(115.436,32.886) 117.094,34.544 117.094,53.34 117.127,53.373 117.127,57.945 118.029,58.847 118.029,60.988 117.348,61.669 117.348,93.208 v1(117.378,93.238)
  Bottom Layer w0.203: v1(169.039,93.805) 169.039,93.867 v1@171.483,96.31
  Bottom Layer w0.254: J17.2@111.499,32.831 J17.2@111.444,32.886 v1(115.436,32.886)
Q_POT_W2_Filters3-4: J13_Filters3-4.4 J21.2 R59_Filters3-4.1 | length 111.6
  Top Layer w0.203: R59_Filters3-4.1@167.742,53.492 167.792,53.492 168.09,53.194 168.09,53.147 v1(168.406,52.829) v1(168.406,52.829)
  Top Layer w0.254: J13_Filters3-4.4@186.563,53.916 v1(186.563,55.366)
  Layer 1 w0.254: v1(115.57,26.162) 136.381,26.939 cw(c136.407,26.259) 136.641,26.898 140.126,25.622 ccw(c140.36,26.262) 140.355,25.581 152.914,25.48 ccw(c152.92,26.161) 153.073,25.498 157.813,26.595 cw(c157.967,25.932) 157.968,26.613 162.59,26.604 cw(c162.588,25.923) 162.784,26.575 163.711,26.296 cw(c163.515,25.644) 163.809,26.258 166.957,24.753 ccw(c167.25,25.367) 167.02,24.726 v1(172.212,22.86) ; v1(168.406,52.829) v1(186.563,55.366)
  Layer 2 w0.254: v1(168.406,52.829) 169.334,51.901 169.334,40.564 169.813,40.086 169.813,25.259 v1(172.212,22.86)
  Bottom Layer w0.254: J21.2@113.984,26.162 v1(115.57,26.162)
Reg_Pin1: IC5.3 J7.1 | length 21
  Top Layer w0.203: J7.1@78.681,61.595 80.565,61.595 82.614,59.545 v1(83.803,59.545) ; v1(83.815,56.173) 83.836,56.152 84.945,56.152 87.508,53.589 89.616,53.589 89.738,53.467 92.202,53.467 92.71,52.959 IC5.3@94.165,52.959
  Bottom Layer w0.203: v1(83.803,59.545) 83.803,56.185 v1(83.815,56.173)
Reg_Pin2: IC5.4 J7.2 | length 26.4
  Top Layer w0.203: J7.2@74.481,61.595 76.395,61.595 77.486,62.686 81.457,62.686 82.804,61.339 v1(82.804,60.452) ; v1(82.804,56.896) 82.839,56.931 84.801,56.931 86.946,54.786 87.741,54.786 87.824,54.869 89.83,54.869 89.845,54.885 92.646,54.885 93.204,54.326 94.068,54.326 IC5.4@94.165,54.229
  Bottom Layer w0.203: v1(82.804,56.896) v1(82.804,60.452)
Reg_Pin3: IC5.5 J7.3 | length 18.7
  Top Layer w0.203: J7.3@78.681,60.325 78.711,60.295 v1(80.937,60.295) ; v1(80.941,58.28) 81.626,57.595 85.114,57.595 86.62,56.09 87.163,56.09 87.201,56.129 89.616,56.129 90.246,55.499 IC5.5@94.165,55.499
  Bottom Layer w0.203: v1(80.937,60.295) 80.939,60.293 80.939,58.282 v1(80.941,58.28)
Reg_Pin4: IC5.6 J7.4 | length 24.7
  Top Layer w0.203: J7.4@74.481,60.325 75.605,60.325 76.468,61.189 76.564,61.189 77.655,62.28 80.936,62.28 v1(81.965,61.251) ; v1(81.824,58.381) 82.203,58.002 86.562,58.002 87.165,57.399 89.616,57.399 90.246,56.769 IC5.6@94.165,56.769
  Bottom Layer w0.203: v1(81.824,58.381) 81.864,58.421 81.864,58.986 81.965,59.087 v1(81.965,61.251)
Reg_Pin5: IC5.7 J7.5 | length 15.9
  Top Layer w0.203: J7.5@78.681,59.055 78.706,59.08 83.341,59.08 83.753,58.669 89.616,58.669 89.811,58.474 90.395,58.474 90.83,58.039 IC5.7@94.165,58.039
pads on no net: IC4.9 IC4.10 IC4.11 IC4.12 IC4.13 IC7.9 IC7.10 IC7.11 IC7.12 IC7.13 IC10_Filters1-2.2 IC10_Filters1-2.7 IC10_Filters1-2.8 IC10_Filters1-2.9 IC10_Filters1-2.10 IC10_Filters1-2.15 IC10_Filters3-4.2 IC10_Filters3-4.7 IC10_Filters3-4.8 IC10_Filters3-4.9 IC10_Filters3-4.10 IC10_Filters3-4.15 IC13.9 IC13.10 IC13.11 IC13.12 IC13.13 IC14.9 IC14.10 IC14.11 IC14.12 IC14.13 IC20_Filters1-2.2 IC20_Filters1-2.7 IC20_Filters1-2.8 IC20_Filters1-2.9 IC20_Filters1-2.10 IC20_Filters1-2.15 IC20_Filters3-4.2 IC20_Filters3-4.7 IC20_Filters3-4.8 IC20_Filters3-4.9 IC20_Filters3-4.10 IC20_Filters3-4.15 IC30_Filters1-2.2 IC30_Filters1-2.7 IC30_Filters1-2.8 IC30_Filters1-2.9 IC30_Filters1-2.10 IC30_Filters1-2.15 IC30_Filters3-4.2 IC30_Filters3-4.7 IC30_Filters3-4.8 IC30_Filters3-4.9 IC30_Filters3-4.10 IC30_Filters3-4.15 U1.1 U1.2 U1.3 U1.4 U1.5 U2.1 U2.2 U2.3 U2.4 U2.5 U3.1 U3.2 U3.3 U3.4 U3.5 U4.1 U4.2 U4.3 U4.4 U4.5

## Polygon pours and split planes (outlines as drawn)
GND on Bottom Layer "NONET_L02_P-001" (solid, remove dead copper, pour order 4): 67.31,98.552 67.31,12 129.794,12 129.794,98.552 123.19,98.552
GND on Bottom Layer "NONET_L02_P-001" (solid, remove dead copper, pour order 8): 129.794,98.552 129.794,12 191.008,12 191.008,98.552
GND on Layer 2 "NONET_L02_P-001" (solid, remove dead copper, pour order 3): 129.672,98.552 191.008,98.552 191.008,12.192 190.754,11.938 129.672,11.938
GND on Layer 2 "NONET_L02_P-001" (solid, remove dead copper, pour order 0): 129.794,98.552 129.794,12 191.008,12 191.008,98.552
+5 on Layer 2 "NONET_L02_P-001" (solid, remove dead copper, pour order 5): 68.834,82.296 69.85,81.28 69.85,60.706 69.85,57.912 82.042,57.912 86.36,57.912 86.868,57.404 86.868,38.1 86.36,37.592 85.09,37.592 84.074,38.608 84.074,52.07 83.058,53.086 80.772,53.086 80.01,52.324 68.072,52.324 67.056,53.34 67.056,82.296
GND on Layer 2 "NONET_L02_P-001" (solid, remove dead copper, pour order 10): 75.438,77.47 75.438,65.024 78.74,61.722 84.074,61.722 84.836,62.484 84.836,75.946 83.312,77.47
+12 on Layer 1 "NONET_L02_P-001" (solid, remove dead copper, pour order 6): 67.056,73.406 88.138,73.406 88.9,74.168 89.154,73.914 93.726,73.914 104.902,85.09 108.966,85.09 108.966,85.344 113.792,90.17 158.75,90.17 159.766,91.186 176.022,91.186 177.292,89.916 177.292,88.646 176.784,88.138 171.196,88.138 163.322,88.138 162.052,86.868 154.94,86.868 154.174,86.102 118.182,86.102 101.93,69.85 67.564,69.85 67.056,70.358
-12 on Layer 1 "NONET_L02_P-001" (solid, remove dead copper, pour order 7): 67.056,73.406 88.138,73.406 88.646,73.914 93.726,73.914 104.902,85.09 108.966,85.09 108.966,85.344 113.792,90.17 158.75,90.17 159.766,91.186 176.022,91.186 177.292,89.916 177.292,88.646 176.784,88.138 171.196,88.138 163.322,88.138 162.052,86.868 162.035,86.885 155.431,86.885 155.194,87.122 154.174,86.102 149.356,86.102 151.882,83.576 154.695,83.576 155.976,82.295 156.52,82.295 157.537,83.312 180.086,83.312 183.134,86.36 183.134,89.154 177.8,94.488 146.048,94.488 144.778,93.218 100.33,93.218 86.614,79.502 67.056,79.502
DGND on Top Layer "NONET_L02_P-001" (solid, remove dead copper, pour order 1): 67.31,98.552 67.31,12 129.032,12 129.032,98.552 123.19,98.552

## Silkscreen, mask and mechanical layers (free items; w line width, h text height)
Top Overlay:
  lines w0.2: 72.834,92.754 72.409,93.491 71.246,95.504 72.834,98.254 ; 72.834,92.754 76.009,92.754 ; 72.834,92.754 76.009,98.254 ; 72.834,98.254 76.009,92.754 ; 72.834,98.254 76.009,98.254 ; 73.551,35.35 76.726,40.85 ; 73.551,35.35 76.726,35.35 ; 73.551,35.35 73.125,36.087 71.963,38.1 73.551,40.85 ; 73.551,40.85 76.726,40.85 ; 73.551,40.85 76.726,35.35 ; 76.009,92.754 77.597,95.504 76.009,98.254 ; 76.726,35.35 78.314,38.1 76.726,40.85 ; 124.252,35.084 123.827,35.821 122.665,37.834 124.252,40.584 ; 124.252,35.084 127.428,35.084 ; 124.252,35.084 127.428,40.584 ; 124.252,40.584 127.428,35.084 ; 124.252,40.584 127.428,40.584 ; 127.428,35.084 129.015,37.834 127.428,40.584 ; 186.015,67.73 185.589,68.467 184.427,70.48 186.015,73.23 ; 186.015,67.73 189.19,67.73 ; 186.015,67.73 189.19,73.23 ; 186.015,73.23 189.19,67.73 ; 186.015,73.23 189.19,73.23 ; 186.271,34.815 185.845,35.552 184.683,37.565 186.271,40.315 ; 186.271,34.815 189.446,34.815 ; 186.271,34.815 189.446,40.315 ; 186.271,40.315 189.446,34.815 ; 186.271,40.315 189.446,40.315 ; 189.19,67.73 190.778,70.48 189.19,73.23 ; 189.446,34.815 191.034,37.565 189.446,40.315
  text "TEST SHIELD" at 86.614,93.091 h1.52
Bottom Overlay:
  circle w0.254: c187.602,70.48 r3.097
  circle w0.254: c187.858,37.564 r3.097
  circle w0.254: c125.84,37.834 r3.097
  circle w0.254: c75.138,38.1 r3.097
  lines w0.2: 72.834,92.754 72.409,93.49 71.246,95.504 72.834,98.254 ; 72.834,92.754 76.009,98.254 ; 72.834,92.754 76.009,92.754 ; 72.834,98.254 76.009,92.754 ; 72.834,98.254 76.009,98.254 ; 76.009,92.754 77.597,95.504 76.009,98.254
Mechanical 3:
  circle w0.013: c187.602,70.48 r1.5
  circle w0.013: c187.602,70.48 r3.175
Mechanical 4:
  circle w0.013: c74.422,95.504 r1.6
  circle w0.013: c74.422,95.504 r1.6
  circle w0.013: c75.138,38.1 r1.6
  circle w0.013: c75.138,38.1 r1.6
  circle w0.013: c154.386,95.881 r1.6
  circle w0.013: c154.386,95.881 r1.6
  circle w0.013: c125.84,37.834 r1.6
  circle w0.013: c125.84,37.834 r1.6
  lines w0.127: 71.12,15.24 74.36,12 188.53,12 191.77,15.24 191.77,98.552 72.39,98.552 71.12,98.552 71.12,15.24